# EAGLE board qo100-gpsdo-covers (EAGLE 9.6.2)
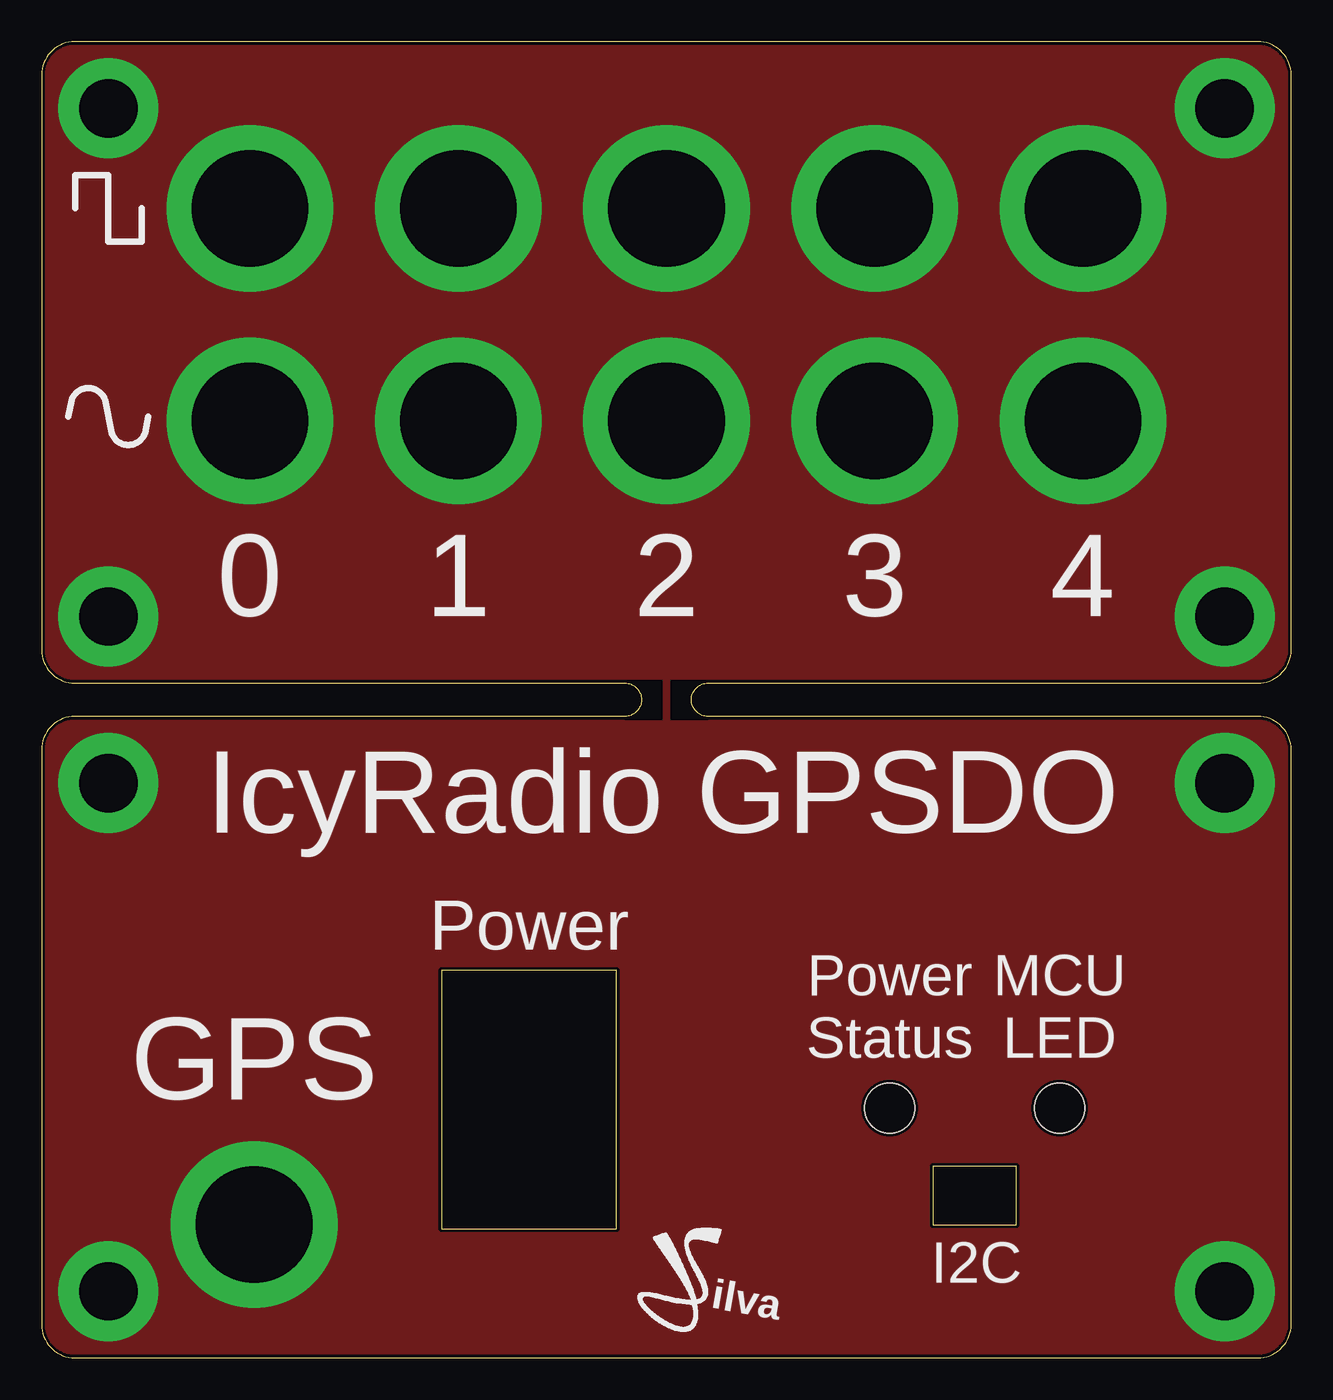
[diagram p0: board, top side]
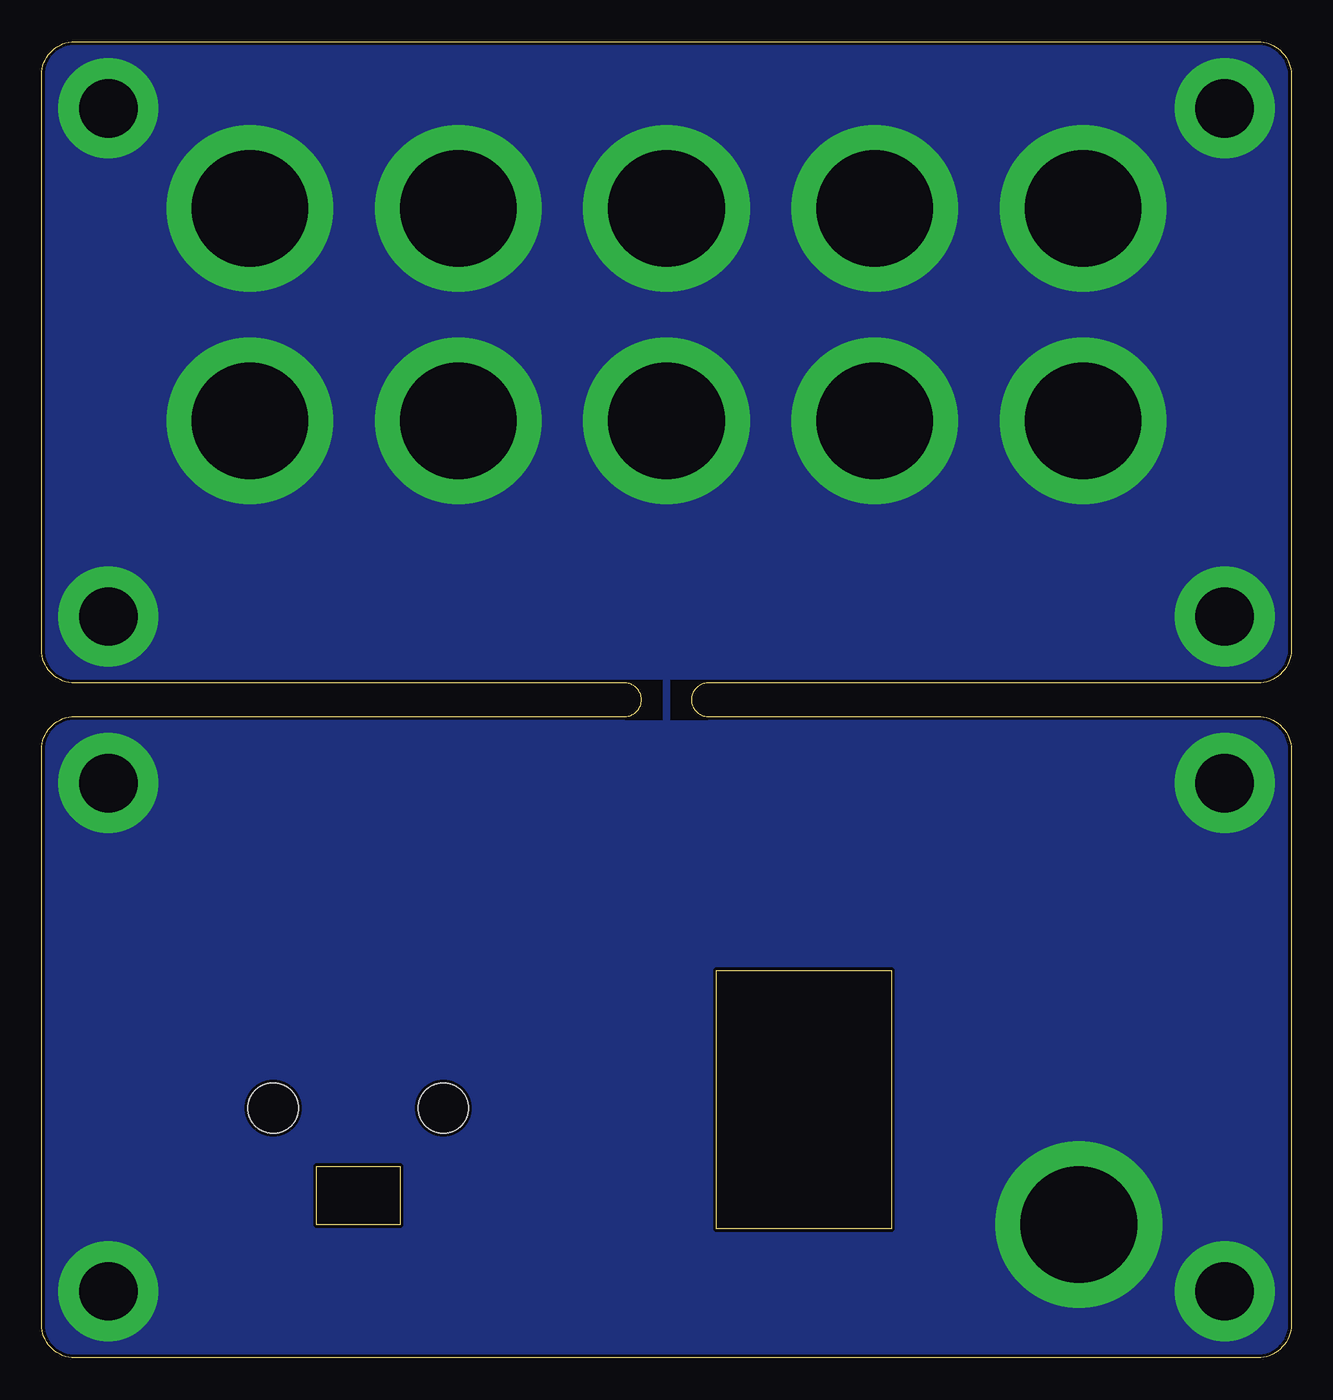
[diagram p1: board, bottom side, seen from below]

Size 75 x 79 mm. Coordinates in mm from the lower left corner, seen from the top.
Outline: 0,36.5 0,2 arc90 2,0 73,0 arc90 75,2 75,36.5 arc90 73,38.5 40,38.5 arc-90 39,39.5 arc-90 40,40.5 73,40.5 arc90 75,42.5 75,77 arc90 73,79 2,79 arc90 0,77 0,42.5 arc90 2,40.5 35,40.5 arc-90 36,39.5 arc-90 35,38.5 2,38.5 arc90 0,36.5
Copper layers (1*16): Top 0.035mm / dielectric 1.6mm / Bottom 0.035mm
Design rules "jlcpcb_2layer": minimum track width 5mil, minimum drill 0.3mm, track to track 5mil, track to pad 5mil, pad to pad 5mil, via to via 5mil, smd to smd 5mil, copper to edge 0.2mm, drill to drill 5mil, minimum pad ring 0.13mm, minimum via ring 0.1mm, stop-mask expansion 0.04mm, vias tented up to drill 10mm, thermal gap 5mil
Holes 3 mm at 50.9,15 61.1,15
tRestrict: area 35,38.3 to 37.2,40.7; area 37.8,38.3 to 40,40.7
bRestrict: area 37.8,38.3 to 40,40.7; area 35,38.3 to 37.2,40.7
Milling: area 24,7.8 to 34.5,23.2; area 53.5,8 to 58.5,11.5

## Placement (x,y rotation side)
E$1  [JSILVA_5MM]  41,8 0 top

## Library data of the parts
E$1 = Silkscreen

## Tracks (layer width: path | path; a pad name or v marks a point on that pad's centre or on a via)
GND  (via drill 3.5 pad 6, 7 pad 10)
  other vias: 4,34.5 4,4 71,4 71,34.5 12.75,8 4,75 4,44.5 71,44.5 71,75 12.5,56.25 12.5,69 25,56.25 25,69 37.5,56.25 37.5,69 50,56.25 50,69 62.5,56.25 62.5,69
  pour Top: -10,-10 80,-10 80,90 -10,90
  pour Bottom: -11,-11 81,-11 81,91 -11,91

## Text on the board
tPlace: 0 | 1 | 2 | 3 | 4 | IcyRadio GPSDO | Power | GPS | Power / Status | MCU / LED | I2C